# Altium PCB MASTER.PcbDoc
Units mm, origin at the board's own origin, x right, y up, seen from the top; angles counter-clockwise.
Board outline 93.47 x 95.25 mm, 2 copper layers (Top Layer, Bottom Layer); 50 components, 56 nets, 298 pads, 94 vias.
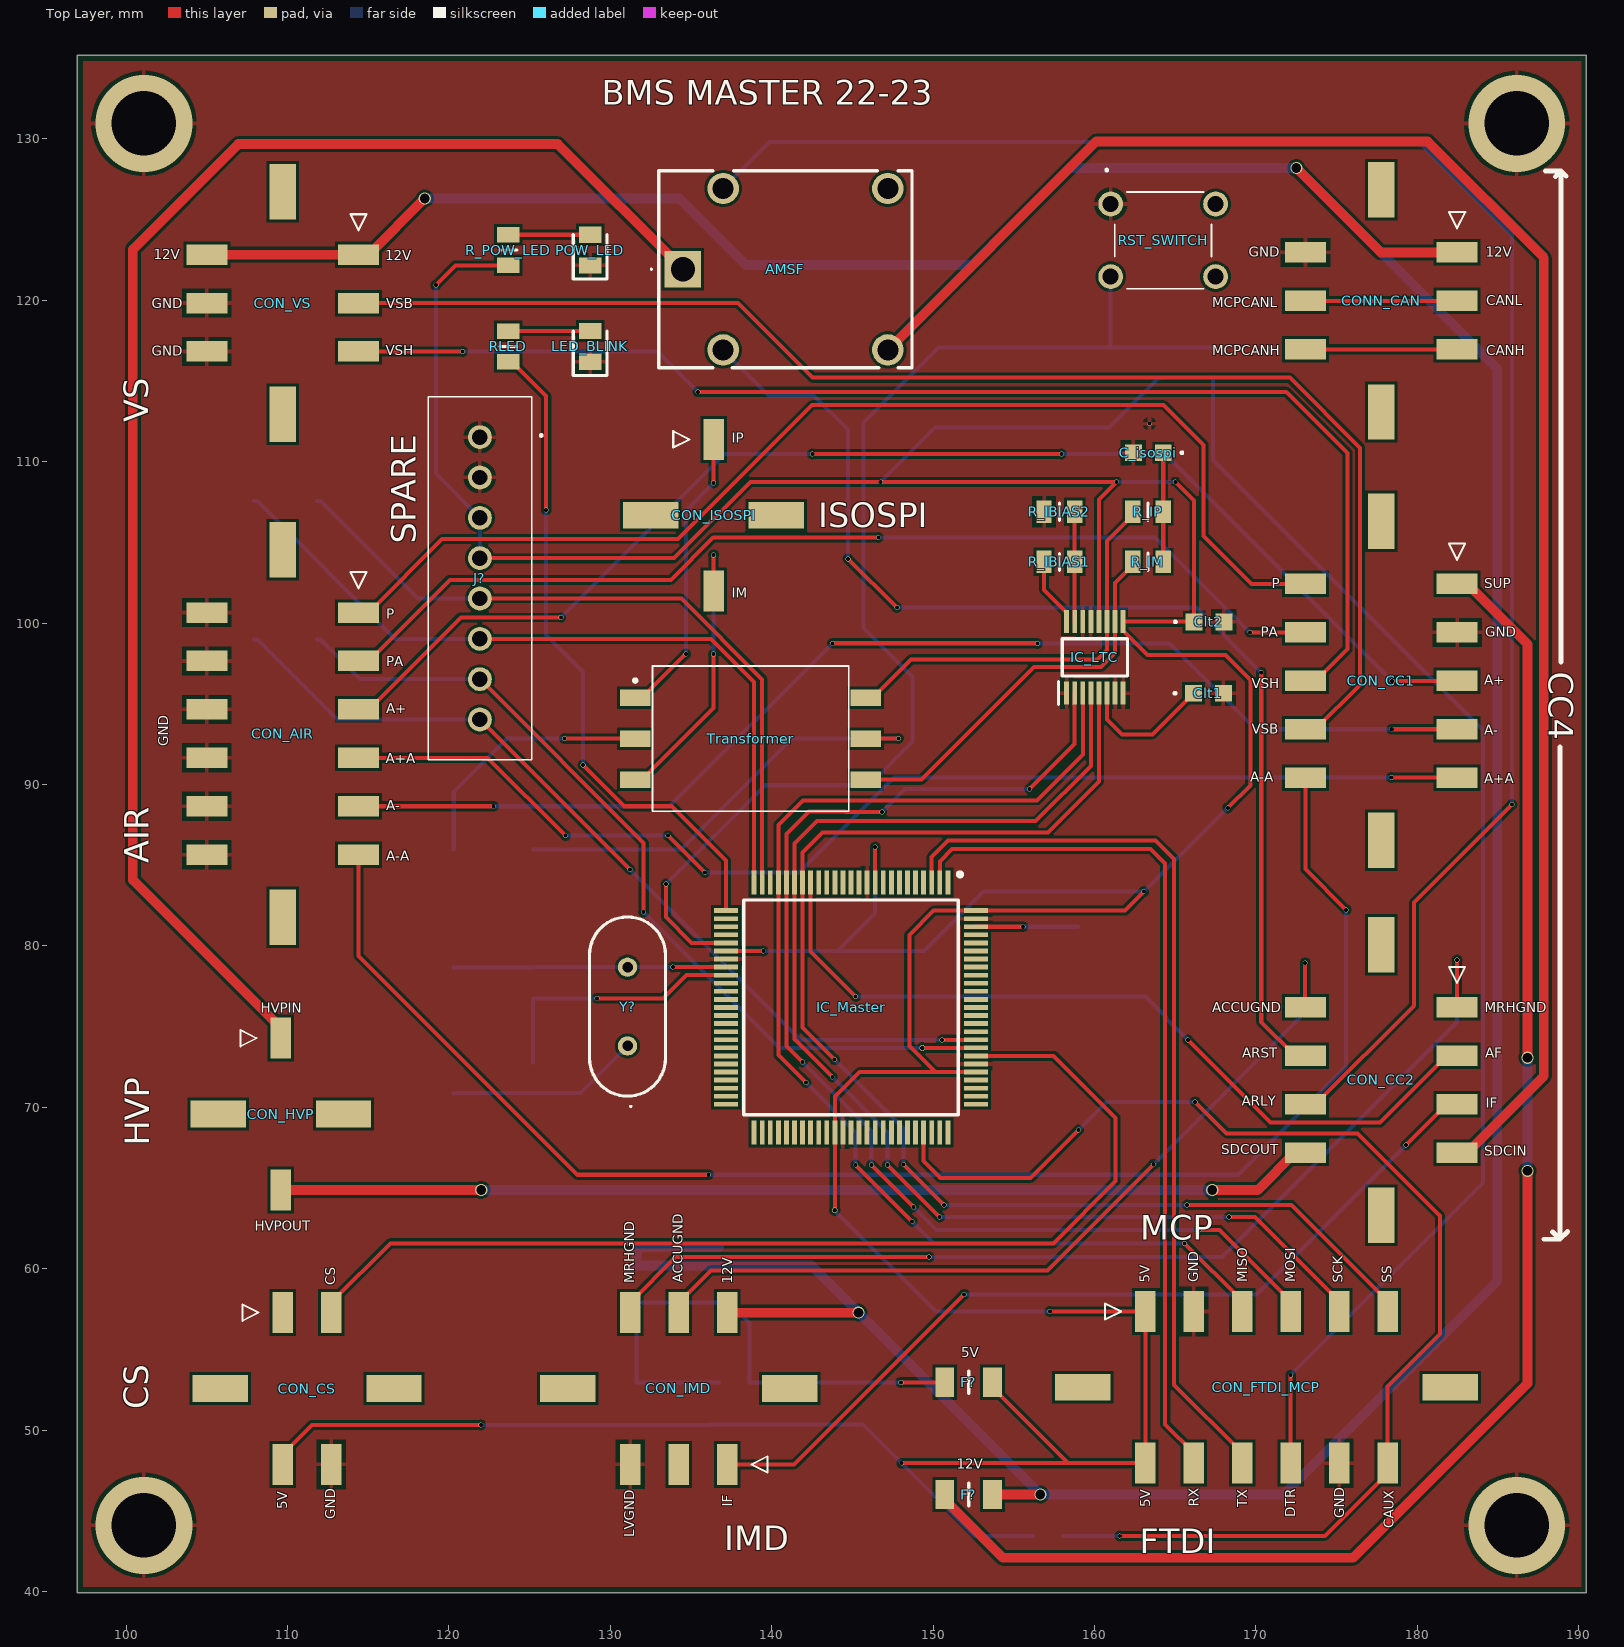
[diagram p0: Top Layer view]
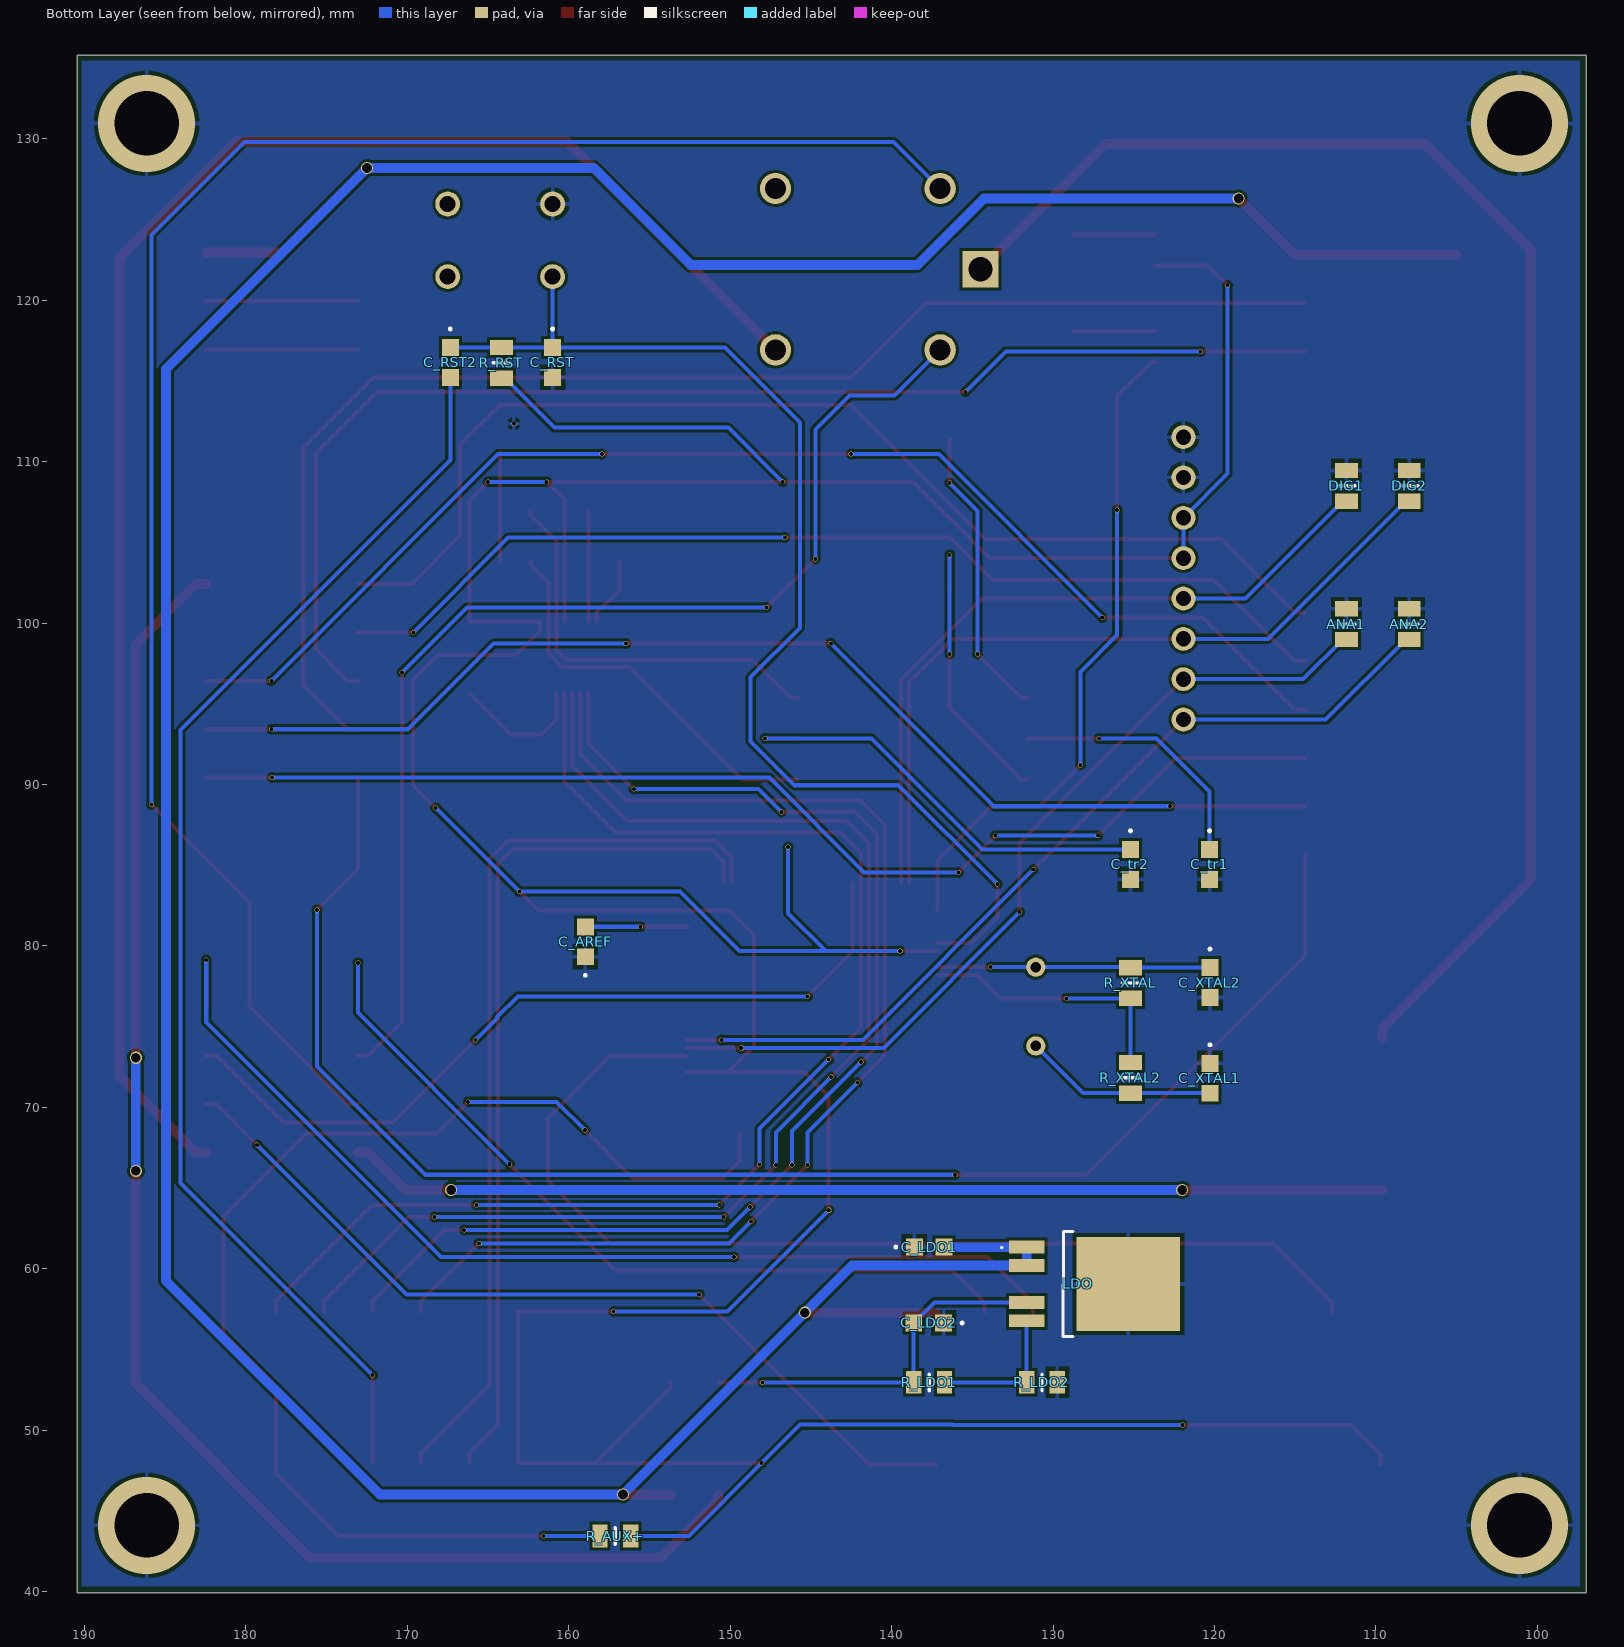
[diagram p1: Bottom Layer view, seen from below]
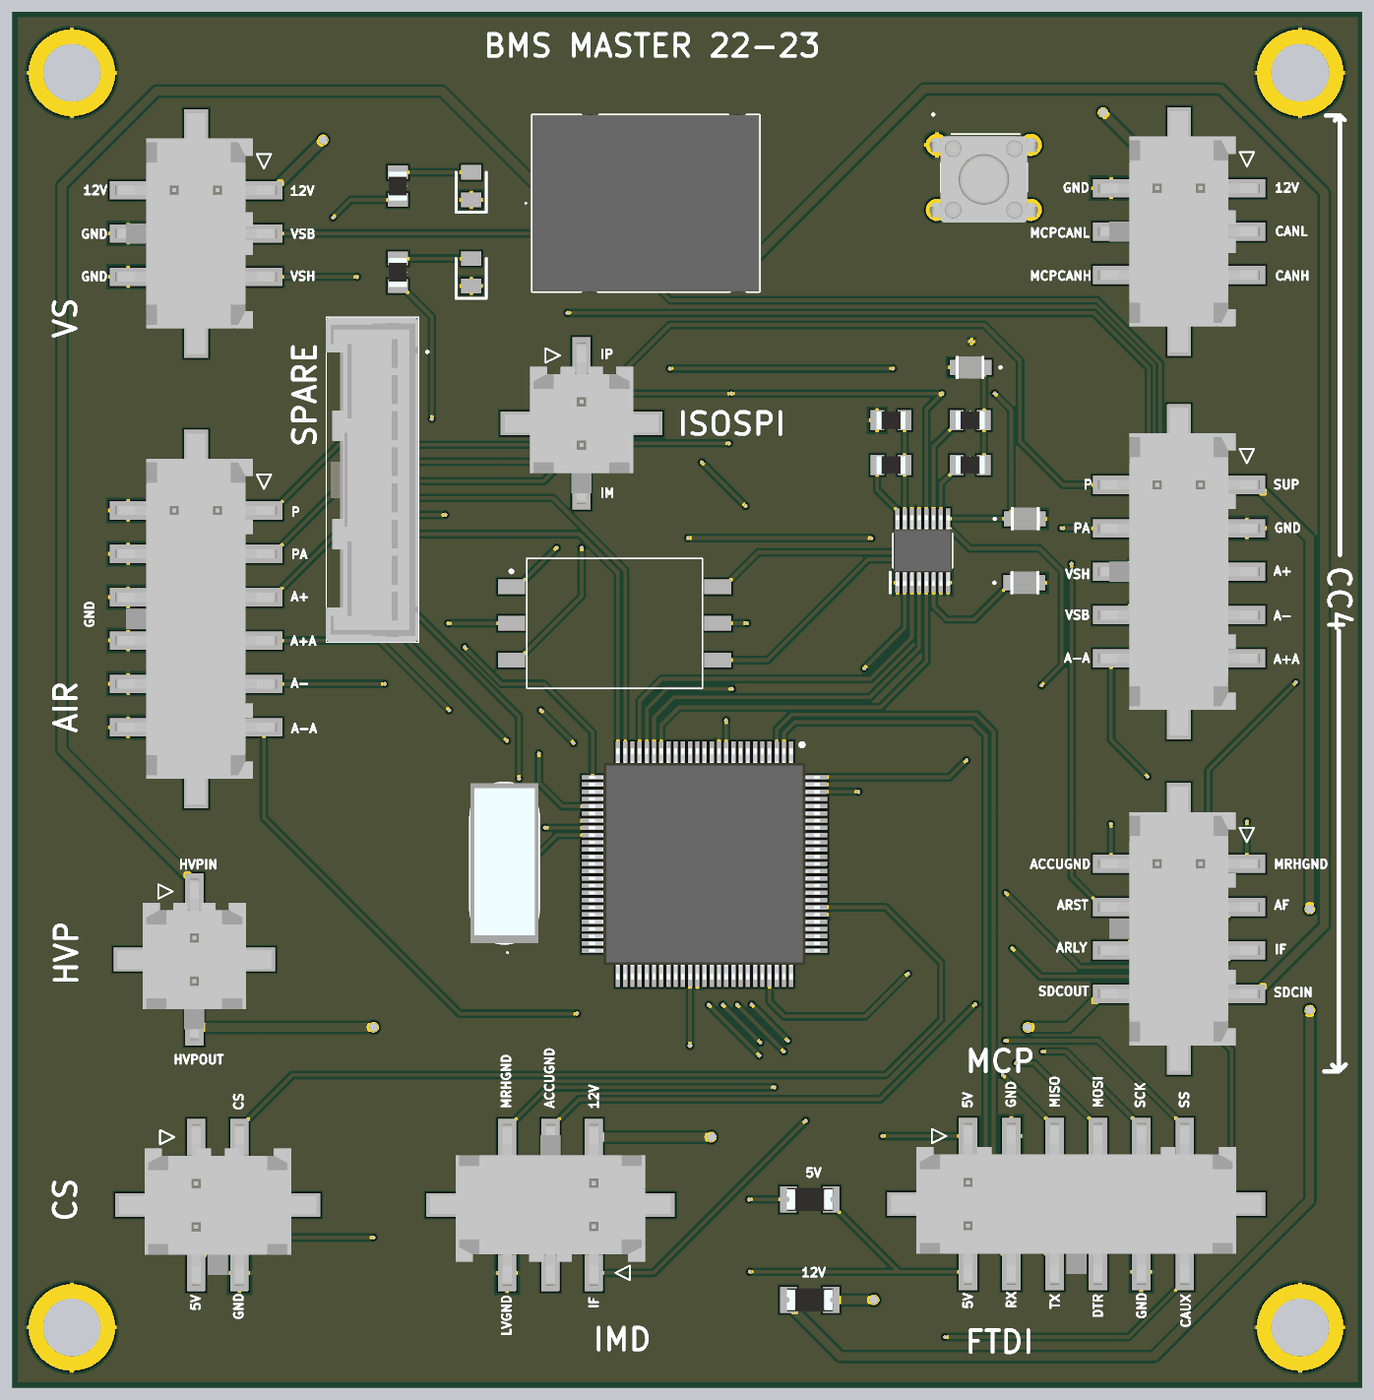
[diagram p2: 3D render of the assembled board from above, using the file's embedded part models]
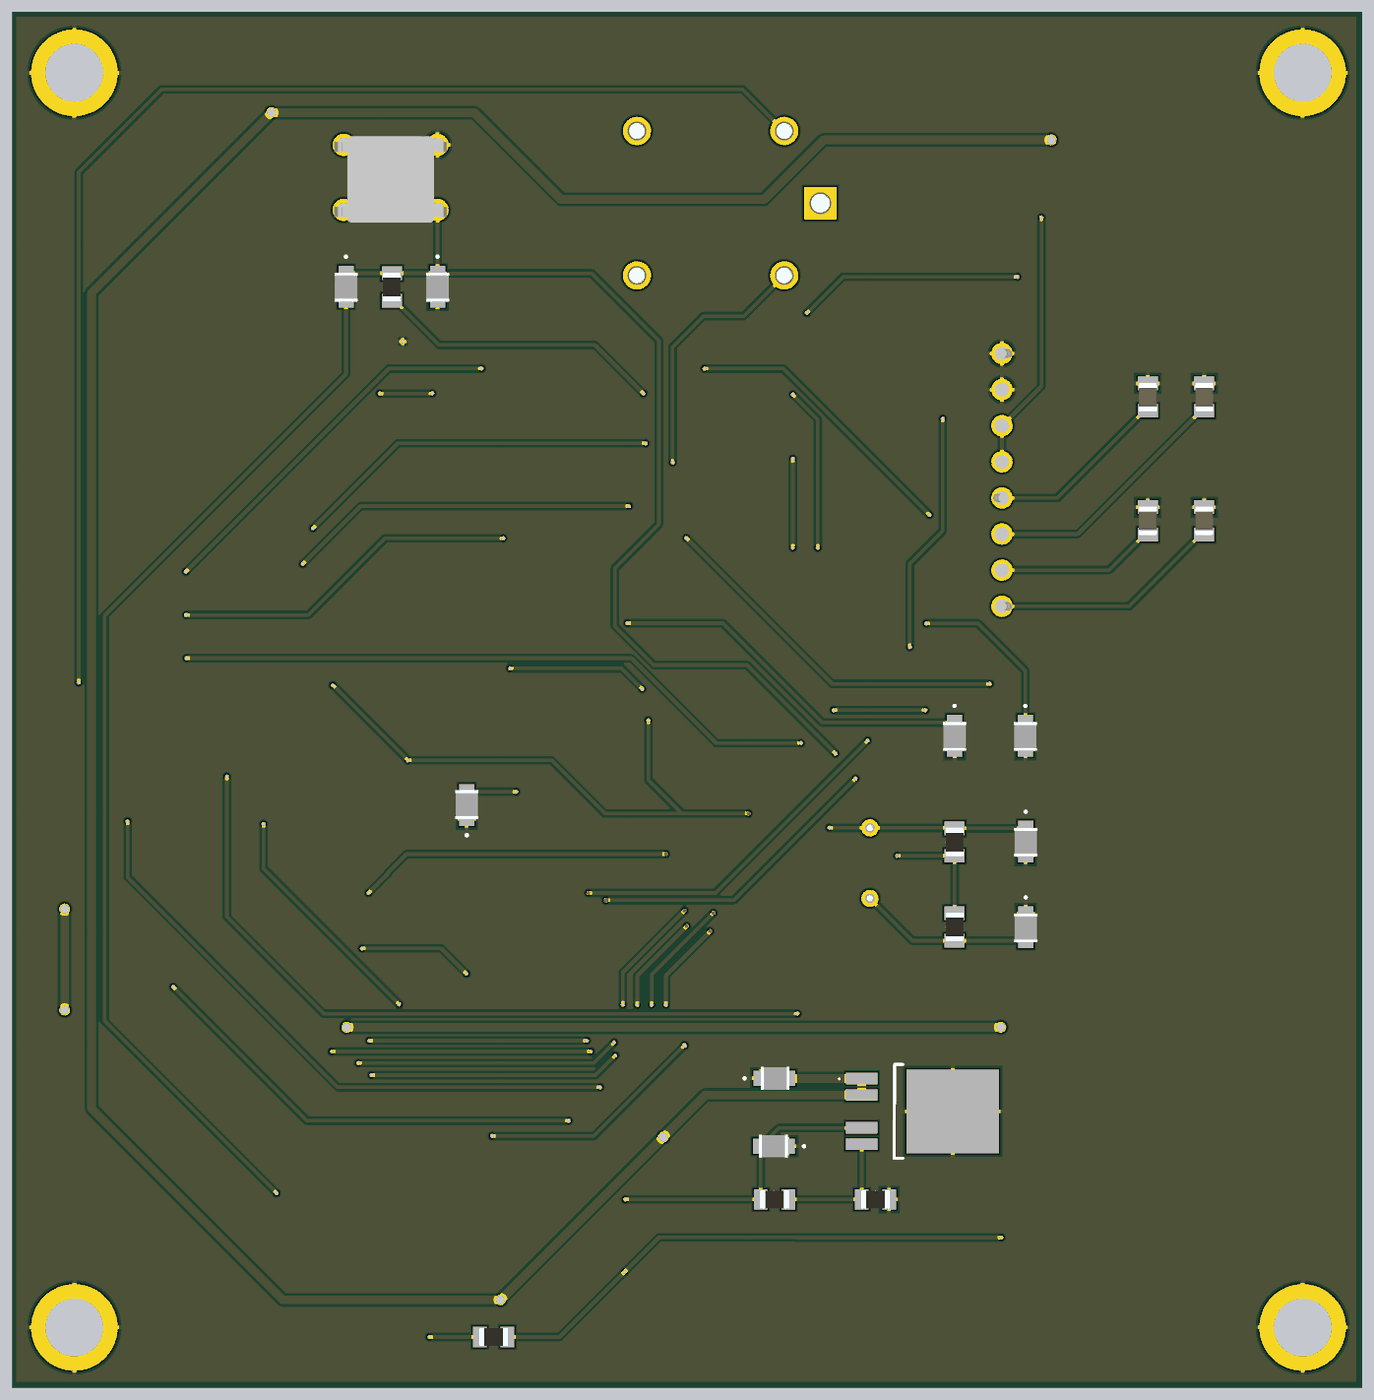
[diagram p3: 3D render of the assembled board from below, using the file's embedded part models]

## Layer stack, top to bottom
Top Solder: solder mask 0.0102, Solder Resist, Dk 3.5
Top Layer: signal copper 0.0356
Dielectric 1: dielectric 0.32, FR-4, Dk 4.8
Bottom Layer: signal copper 0.0356
Bottom Solder: solder mask 0.0102, Solder Resist, Dk 3.5

## Board outline
96.975,39.925 190.45,39.925 190.45,135.175 96.975,135.175

## Design rules (kind name [scope] priority, off if disabled: settings)
Clearance [All] p1: gap=0.17 ignorepadtopadclearanceinfootprint=FALSE
PolygonConnect [All] p1: connectstyle=Relief reliefconductorwidth=0.254 reliefentries=4 polygonreliefangle="90 Angle" airgapwidth=0.254
RoutingVias [All] p1: holewidth=0.25 width=0.3 viastyle="Through Hole" minholewidth=0.25 minwidth=0.3 maxholewidth=0.25 maxwidth=0.3
SolderMaskExpansion [All] p1: expansion=0.102 istentingtop=FALSE
Width [All] p1: maxlimit=0.6 minlimit=0.25 preferedwidth=0.25 minimp=50.000000 maximp=50.000000 favimp=50.000000
30 further rules are at their usual default settings.

## Components (designator, comment, footprint, x,y, rotation, side; value= is the part's Value field where it differs from the comment)
AMSF "SCA20-20-12VDC-C" SCA202012VDCC 134.493,121.92 r180 top
ANA1 "10K" RESC2012X60N 111.82,99.93 r270 bottom
ANA2 "10K" RESC2012X60N 107.92,99.93 r270 bottom
C_AREF "10nF" C2012_Commercial 158.975,80.25 r90 bottom
C_isospi "0.01uF" C2012_Commercial 163.33,110.55 r180 top
C_LDO1 "10nF" C2012_Commercial 137.668,61.341 r180 bottom
C_LDO2 "10nF" C2012_Commercial 137.704,56.642 r0 bottom
C_RST "22pF" C2012_Commercial 161,116.144 r270 bottom
C_RST2 "10uF" C2012_Commercial 167.34,116.144 r270 bottom
C_tr1 "0.01uF" C2012_Commercial 120.3,85.05 r270 bottom
C_tr2 "0.01uF" C2012_Commercial 125.2,85.05 r270 bottom
C_XTAL1 "22pF" C2012_Commercial 120.275,71.795 r270 bottom
C_XTAL2 "22pF" C2012_Commercial 120.275,77.725 r270 bottom
Clt1 "0.01uF" C2012_Commercial 167.055,95.65 r0 top
Clt2 "0.01uF" C2012_Commercial 167.08,100.075 r0 top
CON_AIR "43045-1219" 43045-12YY_181920 109.7,93.15 r90 top
CON_CC1 "43045-1019" 43045-10YY_181920 177.76,96.42 r90 top
CON_CC2 "43045-0819" 43045-08YY_181920 177.76,71.695 r90 top
CON_CS "43045-0419" 43045-04YY_181920 111.21,52.575 r180 top
CON_FTDI_MCP "43045-1219" 43045-12YY_181920 170.65,52.65 r180 top
CON_HVP "43045-0218" 43045-02YY_181920 109.585,69.58 r180 top
CON_IMD "43045-0619" 43045-06YY_181920 134.239,52.578 r0 top
CON_ISOSPI "43045-0218" 43045-02YY_181920 136.398,106.681 r180 top
CON_VS "43045-0619" 43045-06YY_181920 109.7,119.825 r90 top
CONN_CAN "43045-0619" 43045-06YY_181920 177.764,119.959 r90 top
DIG1 "10K" RESC2012X60N 111.82,108.5 r270 bottom
DIG2 "10K" RESC2012X60N 107.92,108.5 r270 bottom
F? "NANOSMDC020F-2" NANOSMDC016F2 152.2,52.96 r0 top
F? "NANOSMDC020F-2" NANOSMDC016F2 152.2,46.01 r180 top
IC_LTC "LTC6820IMS#PBF" SOP50P490X110-16N 160.02,97.872 r90 top
IC_Master "ATMEGA2560-16AU" QFP50P1600X1600X120-100N 144.91,76.184 r270 top
J? "2132415-8" 21324158 121.92,102.77 r90 top
LDO "TLF1963TEATMA1" TLF1963TEATMA1 127.381,59.055 r270 bottom
LED_BLINK "SML-LXT0805IW-TR" LEDC2012X80N 128.751,117.137 r90 top
POW_LED "SML-LXT0805IW-TR" LEDC2012X80N 128.751,123.106 r90 top
R_AUX+ "10k" RESC2012X60N 157.12,43.44 r180 bottom
R_IBIAS1 "2.8K" RESC2012X60N 157.82,103.79 r0 top
R_IBIAS2 "1.2K" RESC2012X60N 157.82,106.89 r0 top
R_IM "51" RESC2012X60N 163.305,103.8 r180 top
R_IP "51" RESC2012X60N 163.305,106.9 r0 top
R_LDO1 "3.3K" RESC2012X60N 137.668,52.959 r0 bottom
R_LDO2 "10K" RESC2012X60N 130.683,52.959 r0 bottom
R_POW_LED "1K" RESC2012X60N 123.671,123.106 r90 top
R_RST "10k" RESC2012X60N 164.17,116.12 r270 bottom
R_XTAL "10M" RESC2012X60N 125.2,77.7 r270 bottom
R_XTAL2 "27" RESC2012X60N 125.2,71.825 r90 bottom
RLED "1K" RESC2012X60N 123.671,117.137 r90 top
RST_SWITCH "1825910-3" 18259103 161,125.959 r90 top
Transformer "HM2113ZNL" HM2113ZNL 138.684,92.837 r270 top
Y? "LFXTAL003169" LFXTAL003169 131.064,73.801 r90 top

## Footprints (in the part's own frame and the unit in brackets; to place one, negate y for a bottom-side part, rotate by r counter-clockwise, add the part's x,y. Pads: shape width x height; smd on the part's side, far side on the other; paste and mask are expansions set on the pad)
43045-02YY_181920 [mm]
  rect 1.27x2.54 smd: 1(0,-4.7) 2(0,4.7)
  rect 3.43x1.65 smd: 3(3.885,0) 4(-3.885,0)
  silkscreen extent 1.5,-5.2 2.5,-4.2, body extent -5.33,-5.6 5.33,5.6, height 9.96
43045-04YY_181920 [mm]
  rect 1.27x2.54 smd: 1(1.5,-4.7) 2(-1.5,-4.7) 3(1.5,4.7) 4(-1.5,4.7)
  rect 3.43x1.65 smd: 5(5.385,0) 6(-5.385,0)
  silkscreen extent 3,-5.2 4,-4.2, body extent -6.83,-5.6 6.83,5.6, height 9.96
43045-06YY_181920 [mm]
  rect 1.27x2.54 smd: 1(3,-4.7) 2(0,-4.7) 3(-3,-4.7) 4(3,4.7) 5(0,4.7) 6(-3,4.7)
  rect 3.43x1.65 smd: 7(6.885,0) 8(-6.885,0)
  silkscreen extent 4.5,-5.2 5.5,-4.2, body extent -8.32,-5.6 8.32,5.6, height 9.96
43045-08YY_181920 [mm]
  rect 1.27x2.54 smd: 1(4.5,-4.7) 2(1.5,-4.7) 3(-1.5,-4.7) 4(-4.5,-4.7) 5(4.5,4.7) 6(1.5,4.7) 7(-1.5,4.7) 8(-4.5,4.7)
  rect 3.43x1.65 smd: 9(8.385,0) 10(-8.385,0)
  silkscreen extent 6,-5.2 7,-4.2, body extent -9.82,-5.6 9.82,5.6, height 9.96
43045-10YY_181920 [mm]
  rect 1.27x2.54 smd: 1(6,-4.7) 2(3,-4.7) 3(0,-4.7) 4(-3,-4.7) 5(-6,-4.7) 6(6,4.7) 7(3,4.7) 8(0,4.7) 9(-3,4.7) 10(-6,4.7)
  rect 3.43x1.65 smd: 11(9.885,0) 12(-9.885,0)
  silkscreen extent 7.5,-5.2 8.5,-4.2, body extent -11.32,-5.6 11.32,5.6, height 9.96
43045-12YY_181920 [mm]
  rect 1.27x2.54 smd: 1(7.5,-4.7) 2(4.5,-4.7) 3(1.5,-4.7) 4(-1.5,-4.7) 5(-4.5,-4.7) 6(-7.5,-4.7) 7(7.5,4.7) 8(4.5,4.7) 9(1.5,4.7) 10(-1.5,4.7) 11(-4.5,4.7) 12(-7.5,4.7)
  rect 3.43x1.65 smd: 13(11.385,0) 14(-11.385,0)
  silkscreen extent 9,-5.2 10,-4.2, body extent -12.83,-5.6 12.83,5.6, height 9.95
18259103 [mm]
  round 1.54 hole 0.99: 1(0,0) 2(0,-6.5) 3(-4.5,0) 4(-4.5,-6.5)
  silkscreen extent -5.25,-6.25 2.15,0.3, body extent -5.39,-7.15 0.61,0.65, height 3.32
21324158 [mm]
  round 1.478 hole 0.95: 1(8.75,0) 2(6.25,0) 3(3.75,0) 4(1.25,0) 5(-1.25,0) 6(-3.75,0) 7(-6.25,0) 8(-8.75,0)
  silkscreen extent -11.25,-3.85 11.25,3.2, body extent -11.25,-3.16 11.25,3.24, height 8.82
C2012_Commercial [mm]
  rect 1.05x1.05 smd: 1(-0.925,0) 2(0.925,0)
  silkscreen extent -2.12,-0.05 -2.03,0.05, body extent -0.96,-0.8 1.04,0.8, height 1.25
HM2113ZNL [mm]
  rect 1.02x1.89 smd: 1(-2.54,-7.145) 2(0,-7.145) 3(2.54,-7.145) 4(2.54,7.145) 5(0,7.145) 6(-2.54,7.145)
  silkscreen extent -4.5,-7.24 4.5,6.08
LEDC2012X80N [mm]
  rect 1x1.4 smd: 1(-0.95,0) 2(0.95,0)
  silkscreen extent -1.8,-1.05 0.95,1.05
LFXTAL003169 [mm]
  round 1.192 hole 0.65: 1(0,0) 2(4.88,0)
  silkscreen extent -3.8,-2.35 7.99,2.35, body extent -3.09,-2.35 7.97,2.35, height 4.1
NANOSMDC016F2 [mm]
  rect 1.16x1.81 smd: 1(-1.475,0) 2(1.475,0)
  silkscreen extent 0,-0.69 0,0.69, body extent -1.6,-0.79 1.6,0.79, height 0.82
QFP50P1600X1600X120-100N [mm]
  rect 1.5x0.3 smd: 1(-7.75,6) 2(-7.75,5.5) 3(-7.75,5) 4(-7.75,4.5) 5(-7.75,4) 6(-7.75,3.5) 7(-7.75,3) 8(-7.75,2.5) 9(-7.75,2) 10(-7.75,1.5) 11(-7.75,1) 12(-7.75,0.5) 13(-7.75,0) 14(-7.75,-0.5) 15(-7.75,-1) 16(-7.75,-1.5) 17(-7.75,-2) 18(-7.75,-2.5) 19(-7.75,-3) 20(-7.75,-3.5) 21(-7.75,-4) 22(-7.75,-4.5) 23(-7.75,-5) 24(-7.75,-5.5) 25(-7.75,-6) 51(7.75,-6) 52(7.75,-5.5) 53(7.75,-5) 54(7.75,-4.5) 55(7.75,-4) 56(7.75,-3.5) 57(7.75,-3) 58(7.75,-2.5) 59(7.75,-2) 60(7.75,-1.5) 61(7.75,-1) 62(7.75,-0.5) 63(7.75,0) 64(7.75,0.5) 65(7.75,1) 66(7.75,1.5) 67(7.75,2) 68(7.75,2.5) 69(7.75,3) 70(7.75,3.5) 71(7.75,4) 72(7.75,4.5) 73(7.75,5) 74(7.75,5.5) 75(7.75,6)
  rect 0.3x1.5 smd: 26(-6,-7.75) 27(-5.5,-7.75) 28(-5,-7.75) 29(-4.5,-7.75) 30(-4,-7.75) 31(-3.5,-7.75) 32(-3,-7.75) 33(-2.5,-7.75) 34(-2,-7.75) 35(-1.5,-7.75) 36(-1,-7.75) 37(-0.5,-7.75) 38(0,-7.75) 39(0.5,-7.75) 40(1,-7.75) 41(1.5,-7.75) 42(2,-7.75) 43(2.5,-7.75) 44(3,-7.75) 45(3.5,-7.75) 46(4,-7.75) 47(4.5,-7.75) 48(5,-7.75) 49(5.5,-7.75) 50(6,-7.75) 76(6,7.75) 77(5.5,7.75) 78(5,7.75) 79(4.5,7.75) 80(4,7.75) 81(3.5,7.75) 82(3,7.75) 83(2.5,7.75) 84(2,7.75) 85(1.5,7.75) 86(1,7.75) 87(0.5,7.75) 88(0,7.75) 89(-0.5,7.75) 90(-1,7.75) 91(-1.5,7.75) 92(-2,7.75) 93(-2.5,7.75) 94(-3,7.75) 95(-3.5,7.75) 96(-4,7.75) 97(-4.5,7.75) 98(-5,7.75) 99(-5.5,7.75) 100(-6,7.75)
  silkscreen extent -8.37,-6.65 6.65,6.88, body extent -8,-8 8,8, height 1.2
RESC2012X60N [mm]
  rect 0.95x1.4 smd: 1(-0.95,0) 2(0.95,0)
  silkscreen extent 0,-0.53 0,0.53, body extent -1,-0.63 1,0.63, height 0.6
SCA202012VDCC [mm]
  rect 2.25x2.25 hole 1.5: 1(0,0)
  round 1.95 hole 1.3: 2(-2.5,5) 3(-12.7,5) 4(-12.7,-5) 5(-2.5,-5)
  silkscreen extent -14.2,-6.1 2,6.1, body extent -14.2,-6.1 1.5,6.1, height 13.8
SOP50P490X110-16N [mm]
  rect 1.425x0.3 smd: 1(-2.212,1.75) 2(-2.212,1.25) 3(-2.212,0.75) 4(-2.212,0.25) 5(-2.212,-0.25) 6(-2.212,-0.75) 7(-2.212,-1.25) 8(-2.212,-1.75) 9(2.212,-1.75) 10(2.212,-1.25) 11(2.212,-0.75) 12(2.212,-0.25) 13(2.212,0.25) 14(2.212,0.75) 15(2.212,1.25) 16(2.212,1.75)
  silkscreen extent -2.93,-2.02 1.15,2.25, body extent -2.45,-2.02 2.45,2.02, height 1.1
TLF1963TEATMA1 [mm]
  rect 0.8x2.2 smd: 1(-2.28,-4.25) 2(-1.14,-4.25) 4(1.14,-4.25) 5(2.28,-4.25)
  rect 5.8x6.4 smd: 3(0,2.05)
  silkscreen extent -3.25,-5.85 3.25,-1.4

## Part data
AMSF: "Relay or Contactor", Manufacturer_Name=LEONE, Datasheet Link=https://www.kuraelectronics.com/new-pdf/SCA%2020.pdf, Height=13.7mm, Manufacturer_Part_Number=SCA20-20-12VDC-C
ANA1 ANA2 DIG1 DIG2: library part RC0805JR-0710KL, "Resistor", Manufacturer_Name=YAGEO, Mouser Part Number=603-RC0805JR-0710KL, Arrow Part Number=RC0805JR-0710KL, Arrow Price/Stock=https://www.arrow.com/en/products/rc0805jr-0710kl/yageo?region=nac, Datasheet Link=https://componentsearchengine.com/Datasheets/2/RC0805JR-0710KL.pdf, Height=0.6mm, Manufacturer_Part_Number=RC0805JR-0710KL, Mouser Price/Stock=https://www.mouser.co.uk/ProductDetail/YAGEO/RC0805JR-0710KL?qs=ZFGQJeMQzF5q%2Fp77vM%2FrVQ%3D%3D
C_AREF C_isospi C_LDO1 C_LDO2 C_RST C_RST2 C_tr1 C_tr2 C_XTAL1 C_XTAL2 Clt1 Clt2: library part C2012C0G1E333J125AA, "Capacitor", Manufacturer_Name=TDK, Mouser Part Number=810-C2012C0G1E333J, Arrow Part Number=C2012C0G1E333J125AA, Arrow Price/Stock=https://www.arrow.com/en/products/c2012c0g1e333j125aa/tdk, Datasheet Link=https://product.tdk.com/system/files/dam/doc/product/capacitor/ceramic/mlcc/catalog/mlcc_commercial_general_en.pdf, Height=0.75mm, Manufacturer_Part_Number=C2012C0G1E333J125AA, Mouser Price/Stock=https://www.mouser.co.uk/ProductDetail/TDK/C2012C0G1E333J125AA?qs=NRhsANhppD9YN6415mAquQ%3D%3D
CON_AIR CON_FTDI_MCP: "Connector", Manufacturer_Name=Molex, Mouser Part Number=538-43045-1219, Datasheet Link=https://www.molex.com/pdm_docs/sd/430450218_sd.pdf, Height=9.91mm, Manufacturer_Part_Number=43045-1219, Mouser Price/Stock=https://www.mouser.co.uk/ProductDetail/Molex/43045-1219?qs=359VwiUTsp3iCU2NVYxNVg%3D%3D
CON_CC1: "Connector", Manufacturer_Name=Molex, Mouser Part Number=538-43045-1019, Arrow Part Number=43045-1019, Arrow Price/Stock=https://www.arrow.com/en/products/43045-1019/molex?region=nac, Datasheet Link=https://www.molex.com/pdm_docs/sd/430450218_sd.pdf, Height=9.91mm, Manufacturer_Part_Number=43045-1019, Mouser Price/Stock=https://www.mouser.co.uk/ProductDetail/Molex/43045-1019?qs=OWQJ9aScCGICje0BO%252BCnwQ%3D%3D
CON_CC2: "Connector", Manufacturer_Name=Molex, Mouser Part Number=538-43045-0819, Arrow Part Number=43045-0819, Arrow Price/Stock=https://www.arrow.com/en/products/43045-0819/molex?region=nac, Datasheet Link=https://www.molex.com/pdm_docs/sd/430450218_sd.pdf, Height=9.91mm, Manufacturer_Part_Number=43045-0819, Mouser Price/Stock=https://www.mouser.co.uk/ProductDetail/Molex/43045-0819?qs=6RXNyJqNVR7Wg0o6pQawlw%3D%3D
CON_CS: "Connector", Manufacturer_Name=Molex, Mouser Part Number=538-43045-0419, Datasheet Link=https://www.molex.com/pdm_docs/sd/430450218_sd.pdf, Height=9.91mm, Manufacturer_Part_Number=43045-0419, Mouser Price/Stock=https://www.mouser.co.uk/ProductDetail/Molex/43045-0419?qs=UeCeOHRHQebVNIQyI9VWWg%3D%3D
CON_HVP CON_ISOSPI: "Connector", Manufacturer_Name=Molex, Mouser Part Number=538-43045-0218, Arrow Part Number=43045-0218, Arrow Price/Stock=https://www.arrow.com/en/products/43045-0218/molex, Datasheet Link=https://www.molex.com/pdm_docs/sd/430450218_sd.pdf, Height=9.91mm, Manufacturer_Part_Number=43045-0218, Mouser Price/Stock=https://www.mouser.co.uk/ProductDetail/Molex/43045-0218?qs=4XSMV6Twtb2qUKINalLbdA%3D%3D
CON_IMD CON_VS CONN_CAN: "Connector", Manufacturer_Name=Molex, Mouser Part Number=538-43045-0619, Arrow Part Number=43045-0619, Arrow Price/Stock=https://www.arrow.com/en/products/43045-0619/molex, Datasheet Link=https://www.molex.com/pdm_docs/sd/430450218_sd.pdf, Height=9.91mm, Manufacturer_Part_Number=43045-0619, Mouser Price/Stock=https://www.mouser.co.uk/ProductDetail/Molex/43045-0619?qs=KC2ywxza1kr7EVu5MuTw7g%3D%3D
F? F?: "Resettable Fuse", Manufacturer_Name=LITTELFUSE, Mouser Part Number=650-NANOSMDC020F-2, Arrow Part Number=NANOSMDC020F-2, Arrow Price/Stock=https://www.arrow.com/en/products/nanosmdc020f-2/littelfuse, Datasheet Link=https://www.littelfuse.com/~/media/electronics/datasheets/resettable_ptcs/littelfuse_ptc_nanosmdc_datasheet.pdf.pdf, Height=1mm, Manufacturer_Part_Number=NANOSMDC020F-2, Mouser Price/Stock=https://www.mouser.co.uk/ProductDetail/Littelfuse/NANOSMDC020F-2?qs=iK0evp%252BCRRU6agwMt7HYjg%3D%3D
IC_LTC: "Integrated Circuit", Manufacturer_Name="Analog Devices", Mouser Part Number=584-LTC6820IMS#PBF, Arrow Part Number=LTC6820IMS#PBF, Arrow Price/Stock=https://www.arrow.com/en/products/ltc6820imspbf/linear-technology, Datasheet Link=https://datasheet.datasheetarchive.com/originals/distributors/Datasheets-SFU1/DSASFU10008504.pdf, Height=1.1mm, Manufacturer_Part_Number=LTC6820IMS#PBF, Mouser Price/Stock=https://www.mouser.co.uk/ProductDetail/Analog-Devices/LTC6820IMSPBF?qs=hVkxg5c3xu9mQWZApkXW1Q%3D%3D
IC_Master: "Integrated Circuit", Manufacturer_Name=Microchip, Mouser Part Number=556-ATMEGA2560-16AU, Arrow Part Number=ATMEGA2560-16AU, Arrow Price/Stock=https://www.arrow.com/en/products/atmega2560-16au/microchip-technology?region=nac, Datasheet Link=https://datasheet.datasheetarchive.com/originals/distributors/Datasheets_SAMA/4a5a397fa76c39b5297f4121ace1d84e.pdf, Height=1.2mm, Manufacturer_Part_Number=ATMEGA2560-16AU, Mouser Price/Stock=https://www.mouser.co.uk/ProductDetail/Microchip-Technology-Atmel/ATMEGA2560-16AU?qs=aqrrBurbvGciYmlAokFS0w%3D%3D
J?: "Connector", Manufacturer_Name="TE Connectivity", Mouser Part Number=571-2132415-8, Arrow Part Number=2132415-8, Arrow Price/Stock=https://www.arrow.com/en/products/2132415-8/te-connectivity?region=nac, Datasheet Link=https://componentsearchengine.com/Datasheets/2/2132415-8.pdf, Height=8.93mm, Manufacturer_Part_Number=2132415-8, Mouser Price/Stock=https://www.mouser.co.uk/ProductDetail/TE-Connectivity/2132415-8?qs=XhI5AayaxxU5%2FK%252BXTeVEJQ%3D%3D
LDO: "Integrated Circuit", Manufacturer_Name=Infineon, Mouser Part Number=726-TLF1963TEATMA1, Arrow Part Number=TLF1963TEATMA1, Arrow Price/Stock=https://www.arrow.com/en/products/tlf1963teatma1/infineon-technologies-ag?region=nac, Datasheet Link=https://www.infineon.com/dgdl/Infineon-TLF1963-DS-v01_00-EN.pdf?fileId=5546d46258fc0bc1015969d2981941e0, Height=2.35mm, Manufacturer_Part_Number=TLF1963TEATMA1, Mouser Price/Stock=https://www.mouser.co.uk/ProductDetail/Infineon-Technologies/TLF1963TEATMA1?qs=SiyfpgnvCZluIGE%2FbZiglw%3D%3D
LED_BLINK POW_LED: "LED", Manufacturer_Name=Lumex, Mouser Part Number=696-SML-LXT0805IW, Arrow Part Number=SML-LXT0805IW-TR, Arrow Price/Stock=https://www.arrow.com/en/products/sml-lxt0805iw-tr/lumex, Datasheet Link=http://uk.rs-online.com/web/p/products/8886313, Height=0.8mm, Manufacturer_Part_Number=SML-LXT0805IW-TR, Mouser Price/Stock=https://www.mouser.co.uk/ProductDetail/Lumex/SML-LXT0805IW-TR?qs=9HInCHf8eFgASaxWaq368w%3D%3D
R_AUX+ R_IBIAS1 R_IBIAS2 R_IM R_IP R_LDO1 R_LDO2 R_POW_LED R_RST R_XTAL R_XTAL2 RLED: library part RC0805JR-0710KL, "Resistor", Manufacturer_Name=KEMET, Mouser Part Number=603-RC0805JR-0710KL, Arrow Part Number=RC0805JR-0710KL, Arrow Price/Stock=https://www.arrow.com/en/products/rc0805jr-0710kl/yageo, Datasheet Link=https://datasheet.datasheetarchive.com/originals/distributors/Datasheets_SAMA/902f9e387b938f871d31120f5fc1d65e.pdf, Height=0.6mm, Manufacturer_Part_Number=RC0805JR-0710KL, Mouser Price/Stock=https://www.mouser.co.uk/ProductDetail/YAGEO/RC0805JR-0710KL?qs=ZFGQJeMQzF5q%2Fp77vM%2FrVQ%3D%3D
RST_SWITCH: "Switch", Manufacturer_Name="TE Connectivity", Mouser Part Number=N/A, Arrow Part Number=1825910-3, Arrow Price/Stock=https://www.arrow.com/en/products/1825910-3/te-connectivity?region=nac, Datasheet Link=http://uk.rs-online.com/web/p/products/4791407, Height=4.3mm, Manufacturer_Part_Number=1825910-3, Mouser Price/Stock=https://www.mouser.co.uk/ProductDetail/TE-Connectivity/1825910-3?qs=bdENzIhz2rnPyBgKfIxERA%3D%3D
Transformer: "Transformer", Manufacturer_Name=Pulse, Mouser Part Number=673-HM2113ZNL, Arrow Part Number=HM2113ZNL, Arrow Price/Stock=https://www.arrow.com/en/products/hm2113znl/pulse-electronics-corporation?region=nac, Datasheet Link=https://www.mouser.com/datasheet/2/336/HM2113ZNL-1224943.pdf, Height=3.45mm, Manufacturer_Part_Number=HM2113ZNL, Mouser Price/Stock=https://www.mouser.co.uk/ProductDetail/Pulse-Electronics/HM2113ZNL?qs=chTDxNqvsykAwD5fAZXknQ%3D%3D
Y?: "Crystal or Oscillator", Manufacturer_Name=IQD, Datasheet Link=https://componentsearchengine.com/Datasheets/2/LFXTAL003169.pdf, Height=4.1mm, Manufacturer_Part_Number=LFXTAL003169

## Via types
v1: diameter 0.3, hole 0.25, Top Layer to Bottom Layer, 80 vias
v2: diameter 0.75, hole 0.6, Top Layer to Bottom Layer, 8 vias
v3: diameter 6, hole 4, Top Layer to Bottom Layer, 4 vias
v4: diameter 0.35, hole 0.3, Top Layer to Bottom Layer, 2 vias

## Nets (pads, with @x,y where several pads share a name; then routed paths per layer and width w, separated by ;. In a path a pad name is that pad's centre, name@x,y a point inside that pad or via, vN(x,y) a via of type N, cw(c..) or ccw(c..) an arc to the next point about the centre after c; other vN are vias at no path point)
5V: C_LDO2.2 F?.1@150.725,52.96 LDO.4 R_LDO1.2 | length 23.3
  Top Layer w0.25: v1(148,52.959) 150.724,52.959 F?.1@150.725,52.96
  Bottom Layer w0.25: LDO.4 137.356,57.915 C_LDO2.2 138.629,52.97 R_LDO1.2 v1(148,52.959)
+5: Clt2.1 CON_CS.3 CON_FTDI_MCP.1 CON_FTDI_MCP.7 F?.2@153.675,52.96 IC_LTC.9 IC_LTC.12 IC_Master.10 IC_Master.31 IC_Master.61 IC_Master.80 IC_Master.100 J?.3 J?.4 R_AUX+.2 R_POW_LED.1 R_RST.2 | length 318.6
  Top Layer w0.25: CON_CS.3 109.71,48.51 111.525,50.325 v1(121.975,50.325) ; v1(119.19,120.93) 120.416,122.156 R_POW_LED.1 ; J?.4 133.945,104.02 138.675,108.75 v1(146.75,108.75) v1(161.366,108.75) 160.27,107.654 IC_LTC.12 ; IC_Master.31 137.165,79.68 139.47,79.68 v1(139.475,79.675) ; v4(143.9,63.62) 143.905,63.625 143.905,68.429 IC_Master.61 143.91,70.66 145.434,72.184 150.141,72.184 ; IC_Master.10 v1(146.41,86.115) ; v1(148.05,47.95) 158.36,47.95 ; IC_Master.80 150.141,72.184 ; F?.2@153.675,52.96 153.675,52.635 158.36,47.95 ; v1(157.225,57.35) CON_FTDI_MCP.1 CON_FTDI_MCP.7 158.36,47.95 ; v1(163.05,83.36) 161.874,82.184 IC_Master.100 150.034,82.184 148.525,80.675 148.525,73.8 150.141,72.184 ; v1(165,108.75) 166.155,107.595 Clt2.1 ; Clt2.1@166.146,100.084 IC_LTC.9 161.795,100.059 161.795,99.496 163.266,98.025 168.1,98.025 169.65,96.475 169.65,89.95 v1(168.25,88.55)
  Bottom Layer w0.25: v1(119.19,120.93) 119.19,109.25 J?.3 J?.4 ; v1(121.975,50.325) 136.209,50.325 136.222,50.337 145.663,50.337 v1(148.05,47.95) 152.56,43.44 R_AUX+.2 ; v1(139.475,79.675) 144.075,79.675 ; v4(143.9,63.62) 150.17,57.35 v1(157.225,57.35) ; v1(146.41,86.115) 146.41,82.01 144.075,79.675 ; v1(146.75,108.75) 150.11,112.11 160.885,112.11 163.945,115.17 R_RST.2 ; v1(161.366,108.75) v1(165,108.75) ; v1(168.25,88.55) 168.24,88.55 v1(163.05,83.36) 153.105,83.36 149.42,79.675 144.075,79.675
+12: C_LDO1.2 CON_IMD.4 CON_VS.1 CON_VS.4 CONN_CAN.1 F?.1@153.675,46.01 LDO.1 LDO.2 | length 241.4
  Top Layer w0.6: CON_VS.4 CON_VS.1 115.035,122.825 v2@118.5,126.29 ; CON_IMD.4@137.242,57.275 v2(145.375,57.275) ; F?.1@153.675,46.01 v2(156.64,46.01) ; v2(172.5,128.19) 177.74,122.95 182.455,122.95 CONN_CAN.1
  Bottom Layer w0.6: v2(118.5,126.3) 134.28,126.3 138.4,122.18 152.44,122.18 158.45,128.19 v2(172.5,128.19) 184.95,115.74 184.95,59.25 171.71,46.01 v2(156.64,46.01) v2(145.375,57.275) 142.455,60.195 LDO.2 LDO.1 131.634,61.338 136.74,61.338 C_LDO1.2
ACCUGND: CON_CC2.5 CON_IMD.5 | length 52.7
  Top Layer w0.25: CON_IMD.5 134.239,57.913 136.226,59.9 157.09,59.9 v1(163.66,66.47) ; v1(173.05,78.95) 173.05,76.205 CON_CC2.5
  Bottom Layer w0.25: v1(163.66,66.47) 173.05,75.86 v1(173.05,78.95)
AIR+VE: CON_AIR.3 CON_CC1.3 | length 80.4
  Top Layer w0.25: CON_AIR.3 115.035,94.65 120.735,100.35 v1(126.95,100.35) ; v1(142.514,110.475) v1(157.95,110.475) ; v1(178.43,96.42) CON_CC1.3
  Bottom Layer w0.25: v1(126.95,100.35) 137.075,110.475 v1(142.514,110.475) ; v1(157.95,110.475) 164.375,110.475 v1(178.43,96.42)
AIR-VE: CON_AIR.5 CON_CC1.4 | length 74.4
  Top Layer w0.25: CON_AIR.5 v1(122.761,88.65) ; v1(143.768,98.744) 143.775,98.75 143.778,98.747 v1@156.455,98.747 ; v1@156.452,98.722 v1(156.455,98.725) ; v1(178.41,93.42) CON_CC1.4
  Bottom Layer w0.25: v1(122.761,88.65) 133.675,88.65 v1(143.768,98.744) ; v1(156.455,98.725) 164.649,98.725 169.954,93.42 v1(178.41,93.42)
AMS_FAULT: CON_CC2.2 IC_Master.18 | length 50.5
  Top Layer w0.25: IC_Master.18 142.41,79.665 145.197,76.878 v1(145.197,76.869) ; v1(165.775,74.175) 170.9,69.05 177.68,69.05 181.825,73.195 CON_CC2.2
  Bottom Layer w0.25: v1(145.197,76.869) 163.156,76.869 164.436,75.589 164.436,75.514 v1(165.775,74.175)
AMS_RELAY: AMSF.5 CON_CC2.7 | length 112
  Top Layer w0.25: CON_CC2.7 173.695,70.195 179.79,76.29 179.79,82.69 v1(185.85,88.75)
  Bottom Layer w0.25: AMSF.5 139.873,129.8 180.1,129.8 185.85,124.05 v1(185.85,88.75)
AMS_RST: AMSF.2 CON_CC2.6 | length 71.5
  Top Layer w0.25: v1(144.725,103.975) 144.729,103.975 147.746,100.959 v1(147.75,100.959) ; v1(170.325,96.95) 170.325,75.295 172.425,73.195 CON_CC2.6
  Bottom Layer w0.25: AMSF.2 139.813,114.1 142.6,114.1 144.725,111.975 v1(144.725,103.975) ; v1(147.75,100.959) 166.316,100.959 v1(170.325,96.95)
ANAPIN1: ANA1.2 IC_Master.83 J?.7 | length 53.8
  Top Layer w0.25: J?.7 132.065,86.375 v1(132.065,82.087) ; v4(149.325,73.675) 149.329,73.679 152.656,73.679 IC_Master.83
  Bottom Layer w0.25: ANA1.2 112.045,98.98 114.505,96.52 J?.7 ; v1(132.065,82.087) 140.477,73.675 v4(149.325,73.675)
ANAPIN2: ANA2.2 IC_Master.84 J?.8 | length 55
  Top Layer w0.25: J?.8 121.925,94.02 131.22,84.725 v1(131.225,84.725) ; v1(150.55,74.175) 150.555,74.18 152.655,74.18 IC_Master.84
  Bottom Layer w0.25: ANA2.2 108.145,98.98 113.105,94.02 J?.8 ; v1(131.225,84.725) 141.775,74.175 v1(150.55,74.175)
AR_MISO: CON_FTDI_MCP.3 IC_LTC.3 IC_Master.22 | length 75.6
  Top Layer w0.25: v1(142.125,71.525) 140.41,73.24 IC_Master.22 140.41,87.485 141.925,89 156.425,89 159.27,91.845 IC_LTC.3 ; v1(145.2,66.425) v1(148.7,62.925) ; v1(165.57,61.565) 169.15,57.985 CON_FTDI_MCP.3
  Bottom Layer w0.25: v1(142.125,71.525) 145.2,68.45 v1(145.2,66.425) ; v1(148.7,62.925) 150.06,61.565 v1(165.57,61.565)
AR_MOSI: CON_FTDI_MCP.4 IC_LTC.2 IC_Master.21 | length 76.1
  Top Layer w0.25: v1(141.9,72.8) 140.91,73.79 IC_Master.21 140.91,86.935 142.3,88.325 144.543,88.325 144.568,88.3 v1(146.825,88.3) ; v1(146.175,66.425) v1(148.775,63.825) ; v1(155.975,89.725) 158.77,92.52 IC_LTC.2 ; v1(166.48,62.4) 167.735,62.4 172.15,57.985 CON_FTDI_MCP.4
  Bottom Layer w0.25: v1(141.9,72.8) 146.175,68.525 v1(146.175,66.425) ; v1(146.825,88.3) 148.25,89.725 v1(155.975,89.725) ; v1(148.775,63.825) 150.2,62.4 v1(166.48,62.4)
AR_RESET: C_RST2.1 C_RST.1 IC_Master.30 R_RST.1 RST_SWITCH.3 | length 74.4
  Top Layer w0.25: v1(133.45,83.825) 133.45,81.775 135.041,80.184 IC_Master.30
  Bottom Layer w0.25: v1(133.45,83.825) 139.575,89.95 146.025,89.95 148.732,92.657 148.732,96.643 145.675,99.7 145.675,112.425 150.319,117.069 C_RST.1 ; RST_SWITCH.3 C_RST.1 ; C_RST2.1 167.339,117.07 R_RST.1 161.001,117.07 C_RST.1
AR_RXD0/TXUART: CON_FTDI_MCP.8 IC_Master.2 | length 53.8
  Top Layer w0.25: IC_Master.2 150.41,85.235 151.175,86 163.475,86 164.375,85.1 164.375,50.36 166.15,48.585 CON_FTDI_MCP.8
AR_SCK: CON_FTDI_MCP.5 IC_LTC.4 IC_Master.20 | length 79.3
  Top Layer w0.25: v1(143.75,71.875) 141.41,74.215 IC_Master.20 141.41,86.335 142.8,87.725 156.35,87.725 159.77,91.145 IC_LTC.4 ; v1(147.175,66.425) v1(150.4,63.2) ; v1(168.325,63.2) 169.935,63.2 175.15,57.985 CON_FTDI_MCP.5
  Bottom Layer w0.25: v1(143.75,71.875) 147.175,68.45 v1(147.175,66.425) ; v1(150.4,63.2) v1(168.325,63.2)
AR_SS: CON_FTDI_MCP.6 IC_LTC.5 IC_Master.19 | length 81.7
  Top Layer w0.25: v1(143.9,72.95) 141.91,74.94 IC_Master.19 141.91,85.785 143.15,87.025 157.1,87.025 160.27,90.195 IC_LTC.5 ; v1(148.175,66.45) v1(150.675,63.95) ; v1(165.725,63.95) 172.185,63.95 178.15,57.985 CON_FTDI_MCP.6
  Bottom Layer w0.25: v1(143.9,72.95) 148.175,68.675 v1(148.175,66.45) ; v1(150.675,63.95) v1(165.725,63.95)
AR_TXD0/RXUART: CON_FTDI_MCP.9 IC_Master.3 | length 56.7
  Top Layer w0.25: IC_Master.3 149.91,85.51 150.925,86.525 163.775,86.525 164.925,85.375 164.925,52.81 169.15,48.585 CON_FTDI_MCP.9
AREF: C_AREF.2 IC_Master.98 | length 6.3
  Top Layer w0.25: IC_Master.98 v1(155.559,81.184)
  Bottom Layer w0.25: v1(155.559,81.184) 158.966,81.184 C_AREF.2
AUX+ve: CON_AIR.4 CON_CC1.5 | length 73.4
  Top Layer w0.25: CON_AIR.4 122.4,91.65 v1(127.225,86.825) ; v1(133.575,86.825) v1(135.85,84.55) ; v1(178.38,90.425) 182.455,90.425 CON_CC1.5
  Bottom Layer w0.25: v1(127.225,86.825) v1(133.575,86.825) ; v1(135.85,84.55) 141.7,84.55 147.575,90.425 v1(178.38,90.425)
AUX-ve: CON_AIR.6 CON_CC1.10 | length 94.8
  Top Layer w0.25: CON_AIR.6 114.4,79.375 127.955,65.82 v1(136.08,65.82) ; CON_CC1.10 173.06,84.76 v1(175.59,82.23)
  Bottom Layer w0.25: v1(136.08,65.82) 168.89,65.82 175.59,72.52 v1(175.59,82.23)
BLINK_LED: IC_Master.26 RLED.1 | length 41.5
  Top Layer w0.25: RLED.1 123.896,116.187 126.025,114.058 v1(126.025,107) ; v1(128.3,91.2) 130.85,88.65 133.8,88.65 137.16,85.29 IC_Master.26
  Bottom Layer w0.25: v1(126.025,107) 126.025,99.25 128.3,96.975 v1(128.3,91.2)
CANH: CONN_CAN.3 CONN_CAN.6 | length 9.4
  Top Layer w0.25: CONN_CAN.6 CONN_CAN.3
CANL: CONN_CAN.2 CONN_CAN.5 | length 9.4
  Top Layer w0.25: CONN_CAN.5 CONN_CAN.2
"CHRG AUX": CON_FTDI_MCP.12 IC_Master.72 R_AUX+.1 | length 78.1
  Top Layer w0.25: IC_Master.72 149.41,66.66 150.44,65.63 156.04,65.63 v1(159,68.59) ; v1(161.56,43.44) 174.275,43.44 178.15,47.315 CON_FTDI_MCP.12 178.15,52.69 181.4,55.94 181.4,63.28 176.29,68.39 168.18,68.39 v1(166.23,70.34)
  Bottom Layer w0.25: R_AUX+.1 v1(161.56,43.44) ; v1(159,68.59) 160.75,70.34 v1(166.23,70.34)
CSOUT: CON_CS.2 IC_Master.82 | length 66.5
  Top Layer w0.25: CON_CS.2 112.71,57.91 116.375,61.575 157.45,61.575 161.3,65.425 161.3,69.35 157.466,73.184 IC_Master.82
DIGIPIN1: DIG1.2 IC_Master.24 J?.5 | length 44.7
  Top Layer w0.25: J?.5 134.405,101.52 139.41,96.515 IC_Master.24
  Bottom Layer w0.25: DIG1.2 112.045,107.55 118.075,101.52 J?.5
DIGIPIN2: DIG2.2 IC_Master.25 J?.6 | length 48
  Top Layer w0.25: J?.6 136.23,99.02 138.91,96.34 IC_Master.25
  Bottom Layer w0.25: DIG2.2 108.145,107.55 116.675,99.02 J?.6
FTDI_DTR: C_RST2.2 CON_FTDI_MCP.10 | length 79.1
  Top Layer w0.25: CON_FTDI_MCP.10 v1(172.15,53.4)
  Bottom Layer w0.25: C_RST2.2 167.34,110.09 184.05,93.38 184.05,65.3 v1(172.15,53.4)
GND: ANA1.1 ANA2.1 C_AREF.1 C_isospi.2 C_LDO1.1 C_LDO2.1 C_RST.2 C_tr1.2 C_tr2.2 C_XTAL1.1 C_XTAL2.2 Clt1.2 Clt2.2 CON_AIR.7 CON_AIR.8 CON_AIR.9 CON_AIR.10 CON_AIR.11 CON_AIR.12 CON_CC1.2 CON_CS.4 CON_FTDI_MCP.2 CON_FTDI_MCP.11 CON_IMD.3 CON_VS.5 CON_VS.6 CONN_CAN.4 DIG1.1 DIG2.1 IC_LTC.1 IC_LTC.7 IC_LTC.8 IC_LTC.13 IC_LTC.14 IC_Master.11 IC_Master.32 IC_Master.62 IC_Master.81 IC_Master.99 J?.1 J?.2 LDO.3 LED_BLINK.1 POW_LED.1 R_IBIAS2.1 R_LDO2.1 RST_SWITCH.1
  other v1: 163.4,112.35
  other v3: 101.1,44.1 186.15,44.1 101.1,130.95 186.15,130.95
HVP_IN: AMSF.1 CON_HVP.1 | length 92.7
  Top Layer w0.6: CON_HVP.1 109.585,74.915 100.42,84.08 100.42,123.145 106.95,129.675 126.738,129.675 AMSF.1
HVP_OUT: CON_CC2.8 CON_HVP.2 | length 64.4
  Top Layer w0.6: CON_HVP.2 v2(122,64.88) ; v2(167.29,64.88) 170.11,64.88 172.425,67.195 CON_CC2.8
  Bottom Layer w0.6: v2(122,64.88) v2(167.29,64.88)
IBIAS: IC_LTC.16 R_IBIAS1.1 | length 4.3
  Top Layer w0.25: R_IBIAS1.1 156.87,102.047 158.27,100.646 IC_LTC.16
ICMP: IC_LTC.15 R_IBIAS1.2 R_IBIAS2.2 | length 6.8
  Top Layer w0.25: IC_LTC.15 R_IBIAS1.2 R_IBIAS2.2
IM: IC_LTC.10 R_IM.2 Transformer.4 | length 24.8
  Top Layer w0.25: Transformer.4 149.272,90.297 156.255,97.28 160.41,97.28 161.27,98.14 IC_LTC.10 161.27,102.49 162.355,103.575 R_IM.2
IM_CON: CON_ISOSPI.2 Transformer.3 | length 18.4
  Top Layer w0.25: Transformer.3 131.974,90.297 136.4,94.723 v1(136.4,98.075) ; CON_ISOSPI.2 136.4,101.983 v1(136.4,104.225)
  Bottom Layer w0.25: v1(136.4,98.075) v1(136.4,104.225)
IMD_FAULT: CON_CC2.3 CON_IMD.1 | length 54.5
  Top Layer w0.25: CON_IMD.1 141.388,47.878 v1(151.92,58.41) ; v1(179.3,67.67) 181.825,70.195 CON_CC2.3
  Bottom Layer w0.25: v1(151.92,58.41) 170.04,58.41 v1(179.3,67.67)
IP: IC_LTC.11 R_IP.1 Transformer.6 | length 25.4
  Top Layer w0.25: Transformer.6 146.264,95.377 148.637,97.75 160.19,97.75 160.77,98.33 IC_LTC.11 160.77,105.09 162.355,106.675 R_IP.1
IP_CON: CON_ISOSPI.1 Transformer.1 | length 18.3
  Top Layer w0.25: Transformer.1 131.974,95.377 134.672,98.075 v1(134.675,98.075) ; CON_ISOSPI.1 136.4,111.379 v1(136.4,108.675)
  Bottom Layer w0.25: v1(134.675,98.075) 134.675,106.95 v1(136.4,108.675)
LVMS: CON_CC1.1 F?.2@150.725,46.01 | length 94
  Top Layer w0.6: F?.2@150.725,46.01 150.725,45.685 154.32,42.09 176.02,42.09 186.82,52.89 v2(186.82,66.06) ; CON_CC1.1 183.095,102.42 186.82,98.695 v2(186.82,73.07)
  Bottom Layer w0.6: v2(186.82,66.06) v2@186.82,73.029
MRHGND: CON_CC2.1 CON_IMD.6 | length 65.8
  Top Layer w0.25: CON_IMD.6 131.239,57.913 134.051,60.725 v1(149.75,60.725) ; CON_CC2.1 v1(182.46,79.13)
  Bottom Layer w0.25: v1(149.75,60.725) 167.905,60.725 182.46,75.28 v1(182.46,79.13)
NetC_isospi_1: C_isospi.1 R_IM.1 R_IP.2 | length 6.8
  Top Layer w0.25: R_IM.1 R_IP.2 C_isospi.1
NetC_tr1_1: C_tr1.1 Transformer.2 | length 16.2
  Top Layer w0.25: v1(127.162,92.837) Transformer.2
  Bottom Layer w0.25: C_tr1.1 120.3,89.55 123.587,92.837 v1(127.162,92.837)
NetC_tr2_1: C_tr2.1 Transformer.5 | length 27.5
  Top Layer w0.25: Transformer.5 145.842,92.85 v1(147.85,92.85)
  Bottom Layer w0.25: C_tr2.1 134.375,85.975 141.25,92.85 v1(147.85,92.85)
NetC_XTAL1_2: C_XTAL1.2 R_XTAL2.1 Y?.1 | length 12
  Bottom Layer w0.25: C_XTAL1.2 120.28,70.875 R_XTAL2.1 128.138,70.875 Y?.1
NetClt1_1: Clt1.1 IC_LTC.6 | length 8.4
  Top Layer w0.25: IC_LTC.6 160.77,94.03 161.7,93.1 163.58,93.1 Clt1.1
NetLDO_5: LDO.5 R_LDO1.1 R_LDO2.2 | length 8.9
  Bottom Layer w0.25: LDO.5 131.631,52.961 R_LDO2.2 R_LDO1.1
NetLED_BLINK_2: LED_BLINK.2 RLED.2 | length 5.1
  Top Layer w0.25: RLED.2 LED_BLINK.2
NetPOW_LED_2: POW_LED.2 R_POW_LED.2 | length 5.1
  Top Layer w0.25: R_POW_LED.2 POW_LED.2
PCR: CON_AIR.1 CON_CC1.6 | length 71.9
  Top Layer w0.25: CON_AIR.1 115.035,100.65 119.585,105.2 134.2,105.2 142.5,113.5 164.275,113.5 166.755,111.02 166.755,105.395 169.724,102.426 173.054,102.426 CON_CC1.6
PCR_AUX: CON_AIR.2 CON_CC1.7 | length 64.3
  Top Layer w0.25: CON_AIR.2 115.035,97.65 120.06,102.675 133.75,102.675 136.375,105.3 v1(146.6,105.3) ; v1(169.625,99.425) 173.055,99.425 CON_CC1.7
  Bottom Layer w0.25: v1(146.6,105.3) 163.75,105.3 v1(169.625,99.425)
SDC_IN: AMSF.3 CON_CC2.4 | length 107
  Top Layer w0.6: AMSF.3 160.103,129.83 180.64,129.83 187.83,122.64 187.83,71.93 183.095,67.195 CON_CC2.4
VS_BAT_IN: CON_CC1.9 CON_VS.2 | length 85
  Top Layer w0.25: CON_VS.2 137.9,119.825 142.525,115.2 172.1,115.2 176.45,110.85 176.45,96.175 173.695,93.42 CON_CC1.9
VS_HV_IN: CON_CC1.8 CON_VS.3 | length 79.4
  Top Layer w0.25: CON_VS.3 v1(120.85,116.825) ; v1(135.425,114.325) 171.875,114.325 175.675,110.525 175.675,98.4 173.695,96.42 CON_CC1.8
  Bottom Layer w0.25: v1(120.85,116.825) 132.925,116.825 v1(135.425,114.325)
XTAL1: IC_Master.34 R_XTAL2.2 R_XTAL.2 | length 16.5
  Top Layer w0.25: v1(129.175,76.75) 133.275,76.75 134.709,78.184 IC_Master.34
  Bottom Layer w0.25: R_XTAL2.2 R_XTAL.2 v1(129.175,76.75)
XTAL2: C_XTAL2.1 IC_Master.33 R_XTAL.1 Y?.2 | length 16.9
  Top Layer w0.25: v1(133.871,78.688) 133.873,78.686 137.158,78.686 IC_Master.33
  Bottom Layer w0.25: C_XTAL2.1 R_XTAL.1 125.231,78.681 Y?.2 133.864,78.681 v1(133.871,78.688)
pads on no net: AMSF.4 CON_AIR.13 CON_AIR.14 CON_CC1.11 CON_CC1.12 CON_CC2.9 CON_CC2.10 CON_CS.1 CON_CS.5 CON_CS.6 CON_FTDI_MCP.13 CON_FTDI_MCP.14 CON_HVP.3 CON_HVP.4 CON_IMD.2 CON_IMD.7 CON_IMD.8 CON_ISOSPI.3 CON_ISOSPI.4 CON_VS.7 CON_VS.8 CONN_CAN.7 CONN_CAN.8 IC_Master.1 IC_Master.4 IC_Master.5 IC_Master.6 IC_Master.7 IC_Master.8 IC_Master.9 IC_Master.12 IC_Master.13 IC_Master.14 IC_Master.15 IC_Master.16 IC_Master.17 IC_Master.23 IC_Master.27 IC_Master.28 IC_Master.29 IC_Master.35 IC_Master.36 IC_Master.37 IC_Master.38 IC_Master.39 IC_Master.40 IC_Master.41 IC_Master.42 IC_Master.43 IC_Master.44 IC_Master.45 IC_Master.46 IC_Master.47 IC_Master.48 IC_Master.49 IC_Master.50 IC_Master.51 IC_Master.52 IC_Master.53 IC_Master.54 IC_Master.55 IC_Master.56 IC_Master.57 IC_Master.58 IC_Master.59 IC_Master.60 IC_Master.63 IC_Master.64 IC_Master.65 IC_Master.66 IC_Master.67 IC_Master.68 IC_Master.69 IC_Master.70 IC_Master.71 IC_Master.73 IC_Master.74 IC_Master.75 IC_Master.76 IC_Master.77 IC_Master.78 IC_Master.79 IC_Master.85 IC_Master.86 IC_Master.87 IC_Master.88 IC_Master.89 IC_Master.90 IC_Master.91 IC_Master.92 IC_Master.93 IC_Master.94 IC_Master.95 IC_Master.96 IC_Master.97 RST_SWITCH.2 RST_SWITCH.4

## Polygon pours and split planes (outlines as drawn)
GND on Bottom Layer "GND_L02_P000" (solid, pour order 0): 97.375,134.825 190.175,134.825 190.175,40.325 97.375,40.325
GND on Top Layer "GND_L01_P001" (solid, pour order 1): 97.345,134.805 190.145,134.805 190.145,40.305 97.345,40.305

## Silkscreen, mask and mechanical layers (free items; w line width, h text height)
Top Overlay:
  lines w0.3: 187.825,61.825 188.825,61.825 ; 187.925,128 188.9,128 ; 188.375,62.275 188.825,61.825 ; 188.55,127.65 188.9,128 ; 188.825,92.325 188.825,61.825 ; 188.9,97.575 188.9,123.9 188.9,128 ; 189.225,127.675 188.9,128 ; 189.3,62.3 188.825,61.825 ; 188.825,61.825 188.825,61.825
  text "BMS MASTER 22-23" at 129.454,132.104 h1.52
  text "GND" at 169.554,122.704 h0.6
  text "12V" at 184.229,122.704 h0.6
  text "12V" at 101.729,122.529 h0.6
  text "12V" at 116.054,122.479 h0.6
  text "CANL" at 184.254,119.679 h0.6
  text "MCPCANL" at 167.279,119.579 h0.6
  text "GND" at 101.579,119.504 h0.6
  text "VSB" at 116.104,119.504 h0.6
  text "MCPCANH" at 167.279,116.604 h0.6
  text "CANH" at 184.254,116.604 h0.6
  text "VSH" at 116.079,116.579 h0.6
  text "GND" at 101.579,116.554 h0.6
  text "VS" at 101.371,112.429 h1.52 r90
  text "IP" at 137.529,111.179 h0.6
  text "ISOSPI" at 142.879,105.929 h1.52
  text "SPARE" at 117.946,104.904 h1.52 r90
  text "P" at 170.979,102.154 h0.6
  text "SUP" at 184.129,102.154 h0.6
  text "IM" at 137.529,101.579 h0.6
  text "P" at 116.129,100.254 h0.6
  text "GND" at 184.204,99.154 h0.6
  text "PA" at 170.294,99.144 h0.6
  text "PA" at 116.129,97.329 h0.6
  text "CC4" at 188.129,96.971 h1.52 r270
  text "A+" at 184.154,96.179 h0.6
  text "VSH" at 169.729,95.954 h0.6
  text "A+" at 116.104,94.404 h0.6
  text "VSB" at 169.729,93.129 h0.6
  text "A-" at 184.154,93.079 h0.6
  text "GND" at 102.621,92.379 h0.6 r90
  text "A+A" at 116.079,91.329 h0.6
  text "A-A" at 169.644,90.154 h0.6
  text "A+A" at 184.154,90.079 h0.6
  text "A-" at 116.104,88.404 h0.6
  text "A-A" at 116.129,85.279 h0.6
  text "AIR" at 101.396,85.104 h1.52 r90
  text "ACCUGND" at 167.294,75.884 h0.6
  text "MRHGND" at 184.174,75.884 h0.6
  text "HVPIN" at 108.354,75.854 h0.6
  text "ARST" at 169.154,73.054 h0.6
  text "AF" at 184.204,73.054 h0.6
  text "ARLY" at 169.104,70.104 h0.6
  text "IF" at 184.229,69.979 h0.6
  text "HVP" at 101.446,67.629 h1.52 r90
  text "SDCOUT" at 167.854,67.079 h0.6
  text "SDCIN" at 184.154,67.004 h0.6
  text "HVPOUT" at 107.979,62.354 h0.6
  text "MCP" at 162.829,61.804 h1.52
  text "GND" at 166.421,59.154 h0.6 r90
  text "MISO" at 169.446,59.154 h0.6 r90
  text "MOSI" at 172.446,59.154 h0.6 r90
  text "ACCUGND" at 134.471,59.129 h0.6 r90
  text "5V" at 163.421,59.129 h0.6 r90
  text "SCK" at 175.371,59.129 h0.6 r90
  text "SS" at 178.421,59.129 h0.6 r90
  text "MRHGND" at 131.471,59.104 h0.6 r90
  text "12V" at 137.546,59.079 h0.6 r90
  text "CS" at 112.946,58.979 h0.6 r90
  text "5V" at 151.744,54.514 h0.6
  text "CS" at 101.371,51.279 h1.52 r90
  text "12V" at 151.464,47.614 h0.6
  text "IF" at 137.546,45.254 h0.6 r90
  text "RX" at 166.446,45.254 h0.6 r90
  text "5V" at 163.446,45.229 h0.6 r90
  text "TX" at 169.471,45.229 h0.6 r90
  text "5V" at 109.971,45.104 h0.6 r90
  text "DTR" at 172.446,44.604 h0.6 r90
  text "GND" at 175.471,44.529 h0.6 r90
  text "GND" at 112.946,44.479 h0.6 r90
  text "CAUX" at 178.526,43.924 h0.6 r90
  text "LVGND" at 131.496,43.354 h0.6 r90
  text "IMD" at 137.054,42.554 h1.52
  text "FTDI" at 162.804,42.379 h1.52